# Altium PCB MB1520.PcbDoc (part 5 of 7)
Units mm, origin at the board's own origin, x right, y up, seen from the top; angles counter-clockwise.
Board outline 159 x 88 mm, 6 copper layers (Top Layer, Signal Layer 1, Signal Layer 2, Signal Layer 3, Signal Layer 4, Bottom Layer), stack 1.572 mm thick; 473 components, 377 nets, 1832 pads, 1378 vias.
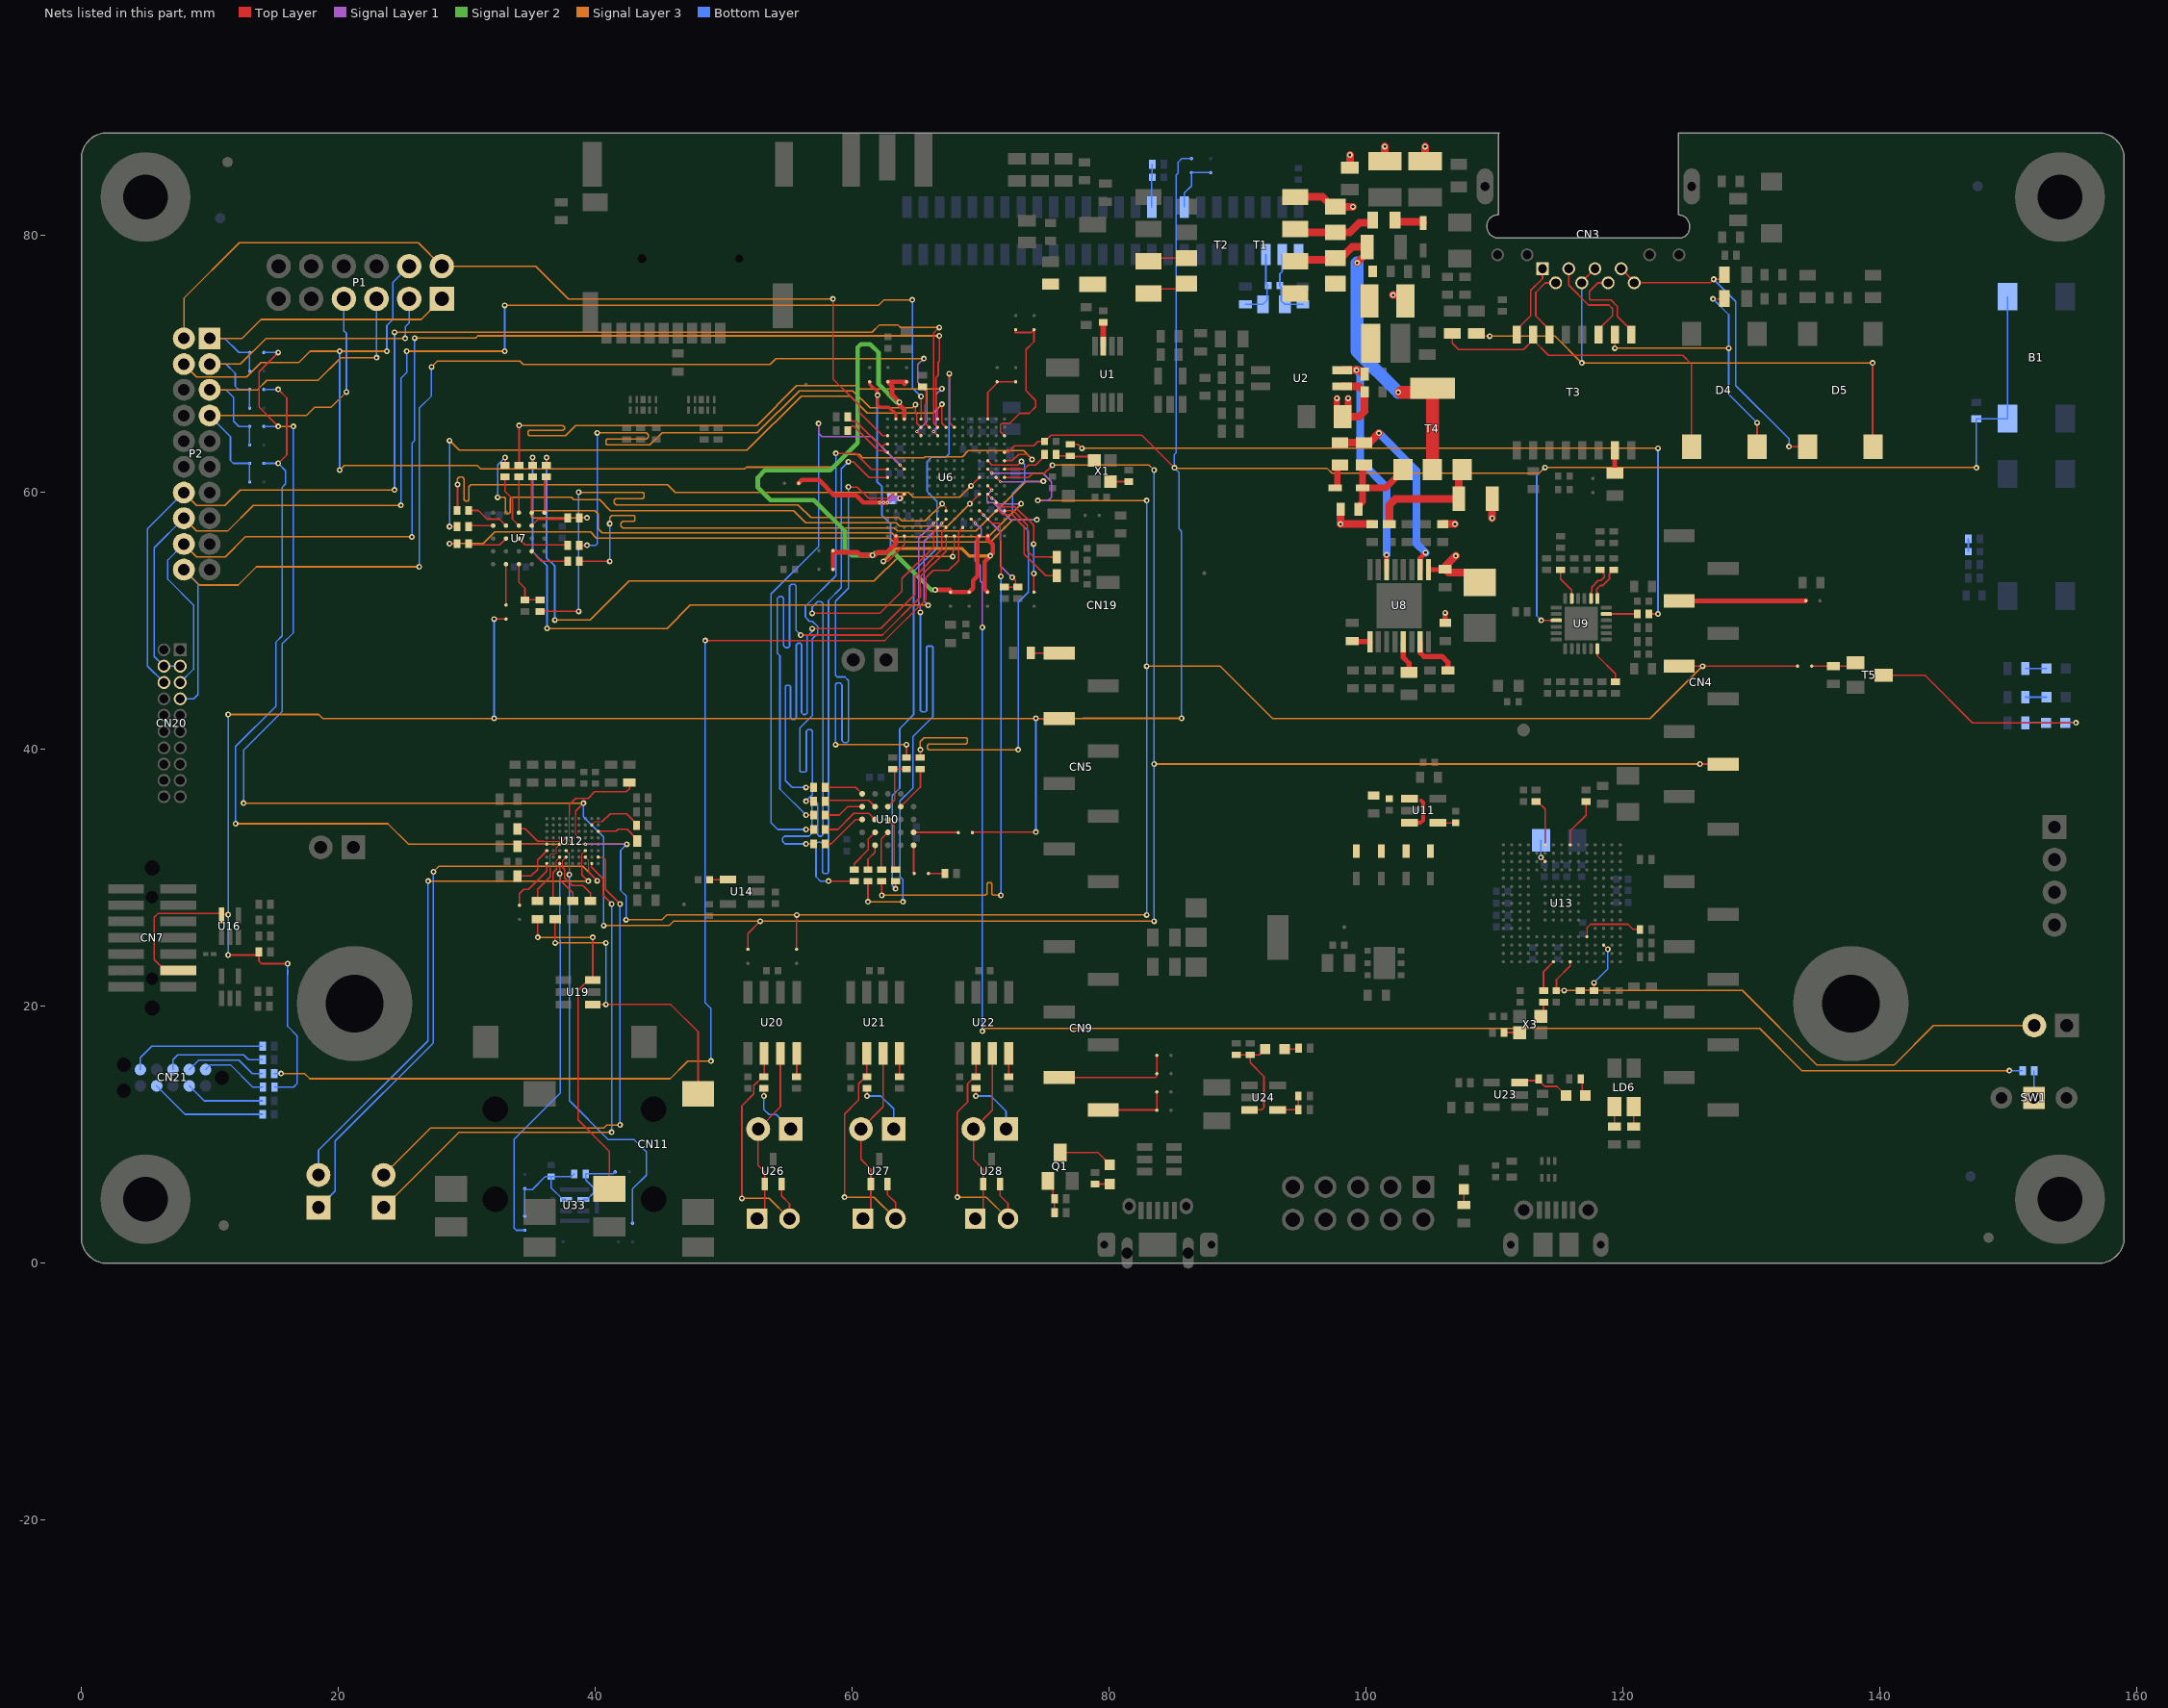
[diagram p8: the nets of this part, all layers, seen from the top]

## Via types
v1: diameter 0.45, hole 0.2, Top Layer to Bottom Layer, tented both sides, 1099 vias
v2: diameter 0.25, hole 0.1, Top Layer to Signal Layer 1, tented both sides, 217 vias
v3: diameter 0.25, hole 0.1, Signal Layer 4 to Bottom Layer, tented both sides, 53 vias
v4: diameter 0.6, hole 0.3, Top Layer to Bottom Layer, tented both sides, 9 vias

## Nets (pads, with @x,y where several pads share a name; then routed paths per layer and width w, separated by ;. In a path a pad name is that pad's centre, name@x,y a point inside that pad or via, vN(x,y) a via of type N, cw(c..) or ccw(c..) an arc to the next point about the centre after c; other vN are vias at no path point) (continued)
NetC73_1: C73.1 C75.2 D8.2 D9.2 D10.2 D11.2 U11.1 U11.3 | length 2.7
  Top Layer w0.3: U11.3@103.386,34.289 104.214,34.289 104.425,34.5 104.425,35.875 104.275,36.025
NetC76_2: C76.2 U11.4 | length 1.4
  Top Layer w0.12: U11.4@105.586,34.289 C76.2@106.986,34.289
NetC78_1: C78.1 U12.E6 | length 4.3
  Top Layer w0.09: 35.945,32.875 37.475,32.875 U12.E6@37.725,33.125
  Top Layer w0.1: C78.1@33.95,33.825 34.55,33.825 35.5,32.875 35.945,32.875
NetC79_2: C79.2 U12.F1 | length 3.5
  Top Layer w0.1: U12.F1@40.225,33.625 41.605,33.625 41.755,33.775 42.475,33.775 43.275,32.975 C79.2@43.275,32.875
NetC80_2: C80.2 U12.D9 | length 2.3
  Top Layer w0.1: C80.2@33.95,32.45 34.125,32.625 U12.D9@36.225,32.625
NetC84_2: C84.2 U12.C9 | length 3.5
  Top Layer w0.1: C84.2@33.95,30.15 35,30.15 35.5,30.65 35.5,31.4 U12.C9@36.225,32.125
NetC85_2: C85.2 U14.4 | length 1.4
  Top Layer w0.12: C85.2@48.9,29.875 U14.4@50.325,29.875
NetC89_1: C89.1 U12.D7 | length 5.3
  Top Layer w0.09: 36.475,30.8 36.475,31.775 36.575,31.875 36.875,31.875 36.975,31.975 36.975,32.375 U12.D7@37.225,32.625
  Top Layer w0.1: C89.1@35.5,28.2 35.5,29.1 36.475,30.075 36.475,30.8
NetC89_2: C89.2 CN11.4 U19.6 | length 27
  Top Layer w0.12: C89.2@35.5,26.8 35.525,26.775 v1(35.525,25.375) ; v1(39.8,25.375) U19.6@39.8,22.05 39.45,22.05 38.65,21.25 38.65,11.175 41.1,8.725 CN11.4@41.1,5.8
  Signal Layer 3 w0.12: v1(35.525,25.375) v1(39.8,25.375)
NetC90_1: C90.1 U12.B7 | length 3.7
  Top Layer w0.09: 36.975,30.8 36.975,31.375 U12.B7@37.225,31.625
  Top Layer w0.1: C90.1@36.875,28.2 36.7,28.375 36.7,30.425 36.975,30.7 36.975,30.8
NetC90_2: C90.2 CN11.6 U19.4 | length 24.5
  Top Layer w0.12: v1(36.875,24.95) C90.2@36.875,26.8 ; U19.4@39.8,20.15 45.875,20.15 48,18.025 CN11.6@48,13.2
  Signal Layer 3 w0.12: v1(36.875,24.95) v1(40.825,24.95)
  Bottom Layer w0.12: v1(40.825,20.15) v1(40.825,24.95)
NetC91_2: C91.2 SB37.2 U12.A7 | length 33.3
  Top Layer w0.1: U12.A7@37.225,31.125 37.225,29.875 38.25,28.85 C91.2@38.25,28.2
  Bottom Layer w0.1: 37.225,27.5 v1(37.225,30.325)
  Bottom Layer w0.12: SB37.2@34.512,2.577 33.848,2.577 33.675,2.75 33.675,9.65 37.28,13.255 37.28,25.118 37.225,25.173 37.225,27.5
NetC92_2: C92.2 U12.B6 | length 4.9
  Top Layer w0.09: 37.475,30.8 37.475,31.375 U12.B6@37.725,31.625
  Top Layer w0.1: 37.475,30.8 37.6,30.675 37.6,30 38.2,29.4 39.05,29.4 39.625,28.825 C92.2@39.625,28.2
NetC104_2: C104.2 JP3.2 U13.J1 | length 43.5
  Top Layer w0.12: C104.2@114.811,21.239 v1(115.411,21.239)
  Top Layer w0.127: C104.2@114.811,21.239 114.811,22.086 115.883,23.158 U13.J1@115.883,23.477
  Signal Layer 3 w0.12: v1(115.411,21.239) 129.286,21.239 135.075,15.45 141.1,15.45 144.167,18.517 JP3.2@152.007,18.517
NetC117_2: C117.2 CN19.32 R136.1 | length 3.3
  Bottom Layer w0.127: CN19.32@83.31,82.217 83.31,84.485 C117.2@83.35,84.525 R136.1@83.35,85.55
NetC118_1: C118.1 C119.2 CN19.45 R138.2 | length 5.5
  Bottom Layer w0.127: R138.2@90.6,74.65 C119.2@91.975,74.65 92.3,74.975 92.3,76.025 C118.1@92.375,76.1 92.2,76.275 CN19.45@92.2,78.531
NetC118_2: C118.2 C119.1 CN19.47 CN19.49 R137.2 | length 6.8
  Bottom Layer w0.127: CN19.49@94.74,78.531 CN19.47@93.47,78.531 93.47,77.195 93.275,77 C118.2@93.275,76.1 93.4,75.975 93.4,74.925 C119.1@93.675,74.65 R137.2@95.075,74.65
NetC130_1: C130.1 SB11.2 U6.E15 U6.F13 | length 10.6
  Top Layer w0.3: v1(63.725,59.55) U6.F13@64.05,59.875
  Top Layer w0.35: SB11.2@55.825,60.725 56.075,60.975 57.425,60.975 58.6,59.8 60.3,59.8 60.875,59.225 v2(62.15,59.225) v2(62.45,59.225) v2(62.75,59.225)
  Signal Layer 1 w0.35: v2(62.15,59.225) v2(62.45,59.225) v2(62.75,59.225) 63.075,59.55 v1(63.725,59.55)
  Bottom Layer w0.45: C130.1@63.025,59.55 v1(63.725,59.55)
NetC138_1: C138.1 R140.1 | length 1
  Bottom Layer w0.12: C138.1@146.875,55.4 R140.1@146.875,56.4
NetC142_2: C142.2 U13.F13 | length 1.8
  Top Layer w0.12: v1(113.608,31.602) U13.F13@113.933,31.277
  Bottom Layer w0.1: v1(113.608,31.602) 113.608,32.908 C142.2@113.625,32.925
NetC158_1: C158.1 R154.2 SB36.1 SB37.1 U33.1 | length 8.9
  Bottom Layer w0.12: SB37.1@34.512,3.677 SB36.1@34.512,5.819 34.581,5.75 35.1,5.75 36.098,6.748 C158.1@36.549,6.748 ; U33.1@37.724,4.973 37.477,4.973 36.549,5.901 C158.1@36.549,6.748 ; R154.2@38.36,6.965 38.143,6.748 C158.1@36.549,6.748
NetCN3_1: CN3.1 T3.16 | length 5.9
  Top Layer w0.13: T3.16@111.741,72.299 111.741,72.691 112.821,73.771 112.821,75.725 113.73,76.634 CN3.1@113.73,77.425
NetCN3_2: CN3.2 T3.14 | length 5.6
  Top Layer w0.13: T3.14@114.281,72.299 114.281,72.669 113.202,73.748 113.202,75.567 113.959,76.325 CN3.2@114.75,76.325
NetCN3_3: CN3.3 T3.11 | length 7.9
  Top Layer w0.13: CN3.3@115.77,77.425 115.77,76.141 117.311,74.6 118.9,74.6 119.171,74.329 119.171,73.771 118.091,72.691 T3.11@118.091,72.299
NetCN3_4: CN3.4 CN3.5 D5.2 R15.2 | length 46.1
  Top Layer w0.12: R15.2@108.586,72.389 108.801,72.175 v1(109.625,72.175) ; CN3.4@116.79,76.325 116.79,76.405 CN3.5@117.81,77.425 ; v1(139.425,70.085) 139.425,63.611 D5.2@139.461,63.574
  Signal Layer 3 w0.12: v1(109.625,72.175) 114.7,72.175 v1(116.79,70.085) v1(139.425,70.085)
  Bottom Layer w0.12: v1(116.79,70.085) CN3.4@116.79,76.325
NetCN3_6: CN3.6 T3.9 | length 7.4
  Top Layer w0.13: CN3.6@118.83,76.325 118.05,76.325 117.375,75.65 117.375,75.075 117.469,74.981 119.058,74.981 119.552,74.487 119.552,73.723 120.631,72.644 T3.9@120.631,72.299
NetCN3_7: CN3.7 CN3.8 D5.1 R9.2 | length 25.7
  Top Layer w0.12: CN3.7@119.85,77.425 120.87,76.405 CN3.8@120.87,76.325 126.775,76.325 v1(127.05,76.6) 127.529,76.6 R9.2@127.888,76.959 ; v1(132.923,63.574) D5.1@134.361,63.574
  Bottom Layer w0.12: v1(127.05,76.6) 128.775,74.875 128.775,68.325 132.923,64.177 v1(132.923,63.574)
NetCN4_8: CN4.8 SB23.1 | length 9.9
  Top Layer w0.127: CN4.8@124.372,51.564 CN4.8@124.375,51.567
  Top Layer w0.35: CN4.8@124.372,51.564 134.189,51.564 SB23.1@134.225,51.6
NetCN5_1: CN5.1 R72.2 | length 2.2
  Top Layer w0.12: R72.2@73.911,47.514 76.098,47.514 CN5.1@76.112,47.5
NetCN9_5: CN9.5 SB31.2 SB32.2 | length 9.3
  Top Layer w0.12: CN9.5@76.112,14.48 83.63,14.48 83.711,14.561 SB32.2@83.711,14.764 SB31.2@83.711,16.189
NetCN9_6: CN9.6 SB33.2 SB34.2 | length 5.6
  Top Layer w0.12: CN9.6@79.541,11.94 83.685,11.94 SB34.2@83.711,11.914 SB33.2@83.711,13.339
NetCN12_1: CN12.1 U12.B3 | length 45.5
  Top Layer w0.09: U12.B3@39.225,31.625 39.475,31.375 39.475,30.8
  Top Layer w0.1: 39.475,30.8 39.475,30.45 v1(40.15,29.775)
  Signal Layer 3 w0.12: v1(27.4,30.475) 27.825,30.9 33.2,30.9 39.025,30.9 v1(40.15,29.775)
  Bottom Layer w0.12: CN12.1@18.453,4.343 19.75,5.64 19.75,9.525 27.4,17.175 v1(27.4,30.475)
NetCN12_2: CN12.2 U12.C3 | length 41.5
  Top Layer w0.09: 38.975,30.85 38.975,31.875 U12.C3@39.225,32.125
  Top Layer w0.1: 38.975,30.85 38.975,30.225 v1(39.45,29.75)
  Signal Layer 3 w0.12: v1(26.975,29.75) 33.2,29.75 v1(39.45,29.75)
  Bottom Layer w0.12: CN12.2@18.453,6.883 18.453,8.803 26.975,17.325 v1(26.975,29.75)
NetCN13_1: CN13.1 U12.A2 | length 41.7
  Top Layer w0.1: U12.A2@39.725,31.125 39.725,30.825 40.6,29.95 40.6,28.65 v1(41.275,27.975)
  Signal Layer 3 w0.12: CN13.1@23.533,4.343 29.39,10.2 v1(41.275,10.2)
  Bottom Layer w0.1: 41.275,27.5 v1(41.275,27.975)
  Bottom Layer w0.12: v1(41.275,10.2) 41.275,27.5
NetCN13_2: CN13.2 U12.B1 | length 41.8
  Top Layer w0.09: U12.B1@40.225,31.625 40.625,31.625 40.8,31.45
  Top Layer w0.1: 40.8,31.45 40.8,29.1 v1(41.925,27.975)
  Signal Layer 3 w0.12: CN13.2@23.533,6.883 27.2,10.55 40.675,10.55 40.9,10.775 v1(41.925,10.775)
  Bottom Layer w0.1: 41.925,27.5 v1(41.925,27.975)
  Bottom Layer w0.12: v1(41.925,10.775) 41.925,27.5
NetCN16_1: CN16.1 JP4.2 U20.7 U26.1 | length 14.1
  Top Layer w0.12: CN16.1@52.58,3.475 53.2,4.095 U26.1@53.2,6.175 53.2,7.1 52.68,7.62 JP4.2@52.68,10.45 54.41,12.18 U20.7@54.41,16.35
NetCN16_2: CN16.2 R119.1 U20.6 U26.2 | length 19.4
  Top Layer w0.12: v1(51.41,5.06) 51.41,12.265 52.335,13.19 52.335,13.835 53.025,14.525 R119.1@53.125,14.525 53.14,14.54 U20.6@53.14,16.35 ; U26.2@54.5,6.175 54.5,5.25 55.12,4.63 CN16.2@55.12,3.475
  Signal Layer 3 w0.12: v1(51.41,5.06) 53.535,5.06 CN16.2@55.12,3.475
NetCN17_1: CN17.1 JP5.2 U21.7 U27.1 | length 14.2
  Top Layer w0.12: CN17.1@60.83,3.475 61.45,4.095 U27.1@61.45,6.175 61.45,7.325 60.68,8.095 JP5.2@60.68,10.45 62.41,12.18 U21.7@62.41,16.35
NetCN17_2: CN17.2 R121.1 U21.6 U27.2 | length 19.6
  Top Layer w0.12: v1(59.4,5.15) 59.4,11.625 60.5,12.725 60.5,13.975 61.05,14.525 R121.1@61.15,14.525 61.14,14.535 U21.6@61.14,16.35 ; U27.2@62.75,6.175 62.75,5.35 63.37,4.73 CN17.2@63.37,3.475
  Signal Layer 3 w0.12: v1(59.4,5.15) 61.695,5.15 CN17.2@63.37,3.475
NetCN18_1: CN18.1 JP6.2 U22.7 U28.1 | length 14.1
  Top Layer w0.12: CN18.1@69.58,3.475 70.2,4.095 U28.1@70.2,6.175 70.2,7.325 69.43,8.095 JP6.2@69.43,10.45 70.91,11.93 U22.7@70.91,16.35
NetCN18_2: CN18.2 R123.1 U22.6 U28.2 | length 19.5
  Top Layer w0.12: v1(68.175,5.15) 68.175,11.75 68.975,12.55 68.975,13.975 69.525,14.525 R123.1@69.625,14.525 69.64,14.54 U22.6@69.64,16.35 ; U28.2@71.5,6.175 71.5,5.275 72.12,4.655 CN18.2@72.12,3.475
  Signal Layer 3 w0.12: v1(68.175,5.15) 70.445,5.15 CN18.2@72.12,3.475
NetCN19_36: CN19.36 SB43.1 SB44.1 | length 4.4
  Bottom Layer w0.12: CN19.36@85.85,82.217 85.85,83.325 86.4,83.875 SB44.1@86.4,84.9 SB43.1@87.9,84.9
NetCN21_2: CN21.2 R152.2 | length 6.2
  Bottom Layer w0.12: CN21.2@8.395,13.815 9.56,12.65 R152.2@14.1,12.65
NetCN21_4: CN21.4 R153.2 | length 9.2
  Bottom Layer w0.12: CN21.4@5.855,13.815 8.07,11.6 R153.2@14.1,11.6
NetCN21_6: CN21.6 R147.2 | length 10.8
  Bottom Layer w0.12: CN21.6@4.585,15.085 4.585,16.01 5.475,16.9 R147.2@14.1,16.9
NetCN21_8: CN21.8 R148.2 | length 8.1
  Bottom Layer w0.12: CN21.8@7.125,15.085 7.125,15.85 7.5,16.225 12.625,16.225 13,15.85 R148.2@14.1,15.85
NetCN21_9: CN21.9 R150.2 | length 6.4
  Bottom Layer w0.12: CN21.9@8.395,15.085 9.135,15.825 12.25,15.825 13.3,14.775 R150.2@14.1,14.775
NetCN21_10: CN21.10 R151.2 | length 5.3
  Bottom Layer w0.12: CN21.10@9.665,15.085 10.035,15.455 11.595,15.455 13.325,13.725 R151.2@14.125,13.725
NetD3_1: D3.1 R4.1 | length 2.3
  Top Layer w0.6: R4.1@102.261,81.214 102.401,81.075 104.346,81.075 D3.1@104.436,80.984
NetD4_1: D4.1 R14.2 T3.15 | length 27.5
  Top Layer w0.12: R14.2@106.711,72.389 106.711,71.614 107.2,71.125 112.25,71.125 T3.15@113.011,71.886 ; T3.15@113.011,72.299 T3.15@113.011,71.886 ; D4.1@125.336,63.574 125.336,69.989 124.65,70.675 114.2,70.675 113.011,71.864 T3.15@113.011,71.886
NetD4_2: D4.2 R12.2 T3.10 | length 23.7
  Top Layer w0.12: v1(119.361,71.239) T3.10@119.361,72.299 ; v1(127,75.075) 127.872,75.075 R12.2@127.886,75.089 ; D4.2@130.436,63.574 v1(130.436,65.439)
  Signal Layer 3 w0.12: v1(119.361,71.239) v1(128.225,71.239)
  Bottom Layer w0.12: v1(127,75.075) 128.225,73.85 128.225,67.65 v1(130.436,65.439)
NetD6_1: D6.1 R34.2 R44.2 T4.1 | length 7.4
  Top Layer w0.508: R44.2@99.411,58.689 99.411,58.961 99.731,59.281 D6.1@99.731,60.364 ; R34.2@99.836,62.139 99.731,62.034 D6.1@99.731,60.364 ; T4.1@102.869,61.778 102.869,61.703 101.53,60.364 D6.1@99.731,60.364
NetD6_2: D6.2 R33.1 | length 1.9
  Top Layer w0.508: D6.2@97.591,60.364 97.761,60.534 97.761,61.939 R33.1@97.961,62.139
NetJP4_1: JP4.1 R119.2 | length 4.4
  Top Layer w0.12: v1(53.125,13.025) R119.2@53.125,13.625
  Bottom Layer w0.12: v1(53.125,13.025) 53.125,11.975 53.525,11.575 54.095,11.575 JP4.1@55.22,10.45
NetJP5_1: JP5.1 R121.2 | length 4.7
  Top Layer w0.12: v1(61.15,13.025) R121.2@61.15,13.625
  Bottom Layer w0.12: v1(61.15,13.025) 62.225,13.025 63.22,12.03 JP5.1@63.22,10.45
NetJP6_1: JP6.1 R123.2 | length 4.8
  Top Layer w0.12: v1(69.625,13.025) R123.2@69.625,13.625
  Bottom Layer w0.12: v1(69.625,13.025) 70.8,13.025 71.97,11.855 JP6.1@71.97,10.45
NetLD1_2: LD1.2 R144.2 | length 1.6
  Bottom Layer w0.12: R144.2@151.325,44.075 LD1.2@152.95,44.075
NetLD2_2: LD2.2 R143.2 | length 1.6
  Bottom Layer w0.12: R143.2@151.325,46.3 LD2.2@152.95,46.3
NetLD3_1: LD3.1 R126.1 | length 1.4
  Top Layer w0.12: R126.1@116.711,14.364 116.825,14.251 116.825,13.301 LD3.1@117.061,13.064
NetLD3_2: LD3.2 R125.1 U23.3 | length 4.3
  Top Layer w0.12: U23.3@111.961,14.064 112.122,14.225 113.297,14.225 R125.1@113.436,14.364 113.436,14.239 113.9,13.775 114.851,13.775 LD3.2@115.561,13.064
NetLD4_1: LD4.1 R132.1 | length 1.2
  Top Layer w0.12: R132.1@78.9,6.175 LD4.1@80.05,6.175
NetLD4_2: LD4.2 Q1.3 | length 4.3
  Top Layer w0.12: Q1.3@76.175,8.625 79.125,8.625 80.05,7.7 LD4.2@80.05,7.675
NetLD5_1: LD5.1 R134.2 | length 1.2
  Top Layer w0.12: R134.2@107.611,4.539 LD5.1@107.611,5.764
NetLD6_2: LD6.2 R131.1 | length 1.5
  Top Layer w0.127: R131.1@120.836,10.664 LD6.2@120.836,12.189
NetLD6_3: LD6.3 R130.1 | length 1.5
  Top Layer w0.127: R130.1@119.336,10.664 LD6.3@119.336,12.189
NetLD7_1: LD7.1 R118.1 | length 1.1
  Top Layer w0.12: LD7.1@93.651,16.688 94.661,16.688 R118.1@94.737,16.764
NetLD7_2: LD7.2 R116.1 R117.1 U24.3 | length 8.2
  Top Layer w0.12: R116.1@89.9,16.225 R117.1@90.975,16.225 ; U24.3@90.925,11.95 91.875,11.95 92.05,12.125 92.05,14.55 90.975,15.625 R117.1@90.975,16.225 ; LD7.2@92.151,16.688 91.688,16.225 R117.1@90.975,16.225
NetLD8_1: LD8.1 R145.1 | length 1.6
  Bottom Layer w0.12: R145.1@151.325,42.075 LD8.1@152.925,42.075
NetLD8_2: LD8.2 T5.3 | length 17.3
  Top Layer w0.12: T5.3@140.3,45.789 143.486,45.789 147.2,42.075 v1(155.25,42.075)
  Bottom Layer w0.12: LD8.2@154.425,42.075 v1(155.25,42.075)
NetQ1_1: Q1.1 R133.1 R135.1 | length 2.7
  Top Layer w0.12: Q1.1@75.225,6.425 75.625,6.025 75.625,5.15 R133.1@75.75,5.025 R135.1@75.75,3.95
NetR16_2: R16.2 U1.3 | length 1.8
  Top Layer w0.45: R16.2@79.536,73.239 79.55,73.226 U1.3@79.55,71.4
NetR22_2: R22.2 U2.4 U8.14 | length 18.4
  Top Layer w0.35: U8.14@101.6,53.996 U8.14@101.6,54.2
  Top Layer w0.4: U8.14@101.6,54.2 v1(101.6,55.15)
  Top Layer w0.6: U2.4@98.136,69.524 v1(99.25,69.524) 99.451,69.524 99.761,69.214 R22.2@99.886,69.214
  Bottom Layer w0.6: v1(99.25,69.524) 99.525,69.249 99.525,62.475 101.6,60.4 v1(101.6,55.15)
NetR24_2: R24.2 U6.P10 | length 3.3
  Top Layer w0.1: R24.2@65.725,68.225 65.725,66.9 65.675,66.85 65.675,65.4 U6.P10@66,65.075
NetR25_2: R25.2 U6.M15 | length 4.1
  Top Layer w0.13: R25.2@59.65,65.9 59.997,65.553 60.272,65.553 62.185,63.641 62.426,63.641 62.56,63.775 U6.M15@62.75,63.775
NetR32_2: R32.2 U6.L15 | length 4.1
  Top Layer w0.13: R32.2@59.65,64.825 59.997,65.172 60.114,65.172 62.027,63.26 62.325,63.26 62.426,63.26 62.56,63.125 U6.L15@62.75,63.125
NetR33_2: R33.2 R34.1 U8.10 | length 15.6
  Top Layer w0.4: U8.10@104.201,53.996 104.201,54.901 v1(104.625,55.325)
  Top Layer w0.6: R33.2@97.961,63.889 R34.1@99.836,63.889 100.264,63.889 v1(101,64.625)
  Bottom Layer w0.6: v1(101,64.625) 103.925,61.7 103.925,56.025 v1(104.625,55.325)
NetR35_2: R35.2 R36.1 X1.3 | length 3.2
  Top Layer w0.127: R36.1@75.875,62.975 76,62.85 R35.2@76.975,62.85 77.025,62.8 78.55,62.8 X1.3@78.85,62.5
NetR36_2: R36.2 U6.J1 | length 3.7
  Top Layer w0.127: U6.J1@71.85,61.825 73.4,61.825 73.725,62.15 74.275,62.15 74.975,62.85 R36.2@74.975,62.975
NetR37_2: R37.2 U6.F4 | length 45.7
  Top Layer w0.127: R37.2@32.975,62.125 v1(32.975,62.725) ; v1(69.15,59.125) U6.F4@69.9,59.875
  Signal Layer 3 w0.102: v1(32.4,59.625) 32.925,59.625 33,59.55 33,58.475 33.1,58.375 33.275,58.375 33.375,58.475 33.375,59.525 33.475,59.625 38.15,59.625 38.326,59.449 38.939,59.449 38.94,59.45 40.331,59.45 41.181,58.6 55.432,58.6 56.375,57.657 63.424,57.657 63.683,57.398 67.423,57.398 v1(69.15,59.125)
  Bottom Layer w0.127: v1(32.4,59.625) 32.4,62.15 v1(32.975,62.725)
NetR38_1: R38.1 U6.N9 | length 48
  Top Layer w0.127: R38.1@34.05,62.125 34.076,62.151 v1(34.076,65.226) ; v2(66.325,64.75) U6.N9@66.65,64.425
  Signal Layer 1 w0.1: v2(66.325,64.75) 66.539,64.963 66.539,67.639 v1(66.975,68.075)
  Signal Layer 3 w0.102: v1(34.076,65.226) 37.475,65.226 37.6,65.101 37.6,64.95 37.475,64.825 34.85,64.825 34.75,64.725 34.75,64.525 34.85,64.425 37.674,64.425 38.475,65.226 52.576,65.226 55.675,68.325 60.325,68.325 60.575,68.075 v1(66.975,68.075)
NetR39_1: R39.1 U6.C8 | length 52.3
  Top Layer w0.127: R39.1@35.125,62.125 v1(35.125,62.725) ; v2(66.975,57.6) U6.C8@67.3,57.925
  Signal Layer 1 w0.1: v1(65.9,51.225) 65.578,51.547 65.578,56.203 v2(66.975,57.6)
  Signal Layer 3 w0.102: v1(36.25,49.425) 45.575,49.425 47.401,51.251 65.874,51.251 v1(65.9,51.225)
  Bottom Layer w0.127: v1(35.125,62.725) 35.125,55.396 36.25,54.271 v1(36.25,49.425)
NetR40_1: R40.1 U6.A7 | length 48.2
  Top Layer w0.1: v1(67.825,55.025) 67.825,55.413 67.95,55.538 U6.A7@67.95,56.625
  Top Layer w0.127: R40.1@36.2,62.125 v1(36.2,62.725)
  Signal Layer 3 w0.102: v1(36.85,50.075) 39.6,50.075 42.625,53.1 61.7,53.1 63.625,55.025 v1(67.825,55.025)
  Bottom Layer w0.127: v1(36.2,62.725) 36.2,54.925 36.85,54.275 v1(36.85,50.075)
NetR41_1: R41.1 X1.1 | length 1.4
  Top Layer w0.12: X1.1@80.1,60.85 R41.1@81.525,60.85
NetR42_1: R42.1 T3.7 | length 1.8
  Top Layer w0.381: R42.1@119.361,61.514 T3.7@119.361,63.279
NetR43_2: R43.2 R47.2 T4.3 | length 9.5
  Top Layer w0.6: R47.2@101.811,57.539 101.811,59.061 102.264,59.514 R43.2@107.211,59.514 T4.3@107.211,61.52
  Top Layer w0.762: T4.3@107.211,61.52 T4.3@107.469,61.778
NetR45_2: R45.2 U6.H4 | length 47
  Top Layer w0.127: R45.2@29.25,58.6 29.275,58.625 v1(29.275,60.625) ; v1(69.25,60.525) U6.H4@69.9,61.175
  Signal Layer 3 w0.102: v1(29.275,60.625) 29.275,61.05 29.425,61.2 29.675,61.2 29.8,61.075 29.8,59.45 29.9,59.35 30.075,59.35 30.175,59.45 30.175,60.475 30.325,60.625 45.625,60.625 46.225,60.025 64.375,60.025 64.75,59.65 68.375,59.65 v1(69.25,60.525)
NetR46_2: R46.2 U6.F3 | length 48.9
  Top Layer w0.127: R46.2@38.75,58.025 v1(39.35,58.025) ; U6.F3@70.55,59.875 v2(70.875,59.55)
  Signal Layer 1 w0.1: v2(70.875,59.55) 70.98,59.445 71.058,59.445 71.378,59.125 v1(73.15,59.125)
  Signal Layer 3 w0.102: v1(39.35,58.025) 35.15,58.025 35.025,58.15 35.025,58.425 35.175,58.575 39.975,58.575 40.225,58.325 40.225,57.15 40.522,56.853 63.091,56.853 63.369,56.575 70.6,56.575 v1(73.15,59.125)
NetR48_1: R48.1 U6.P8 | length 50.4
  Top Layer w0.1: v1(66.975,66.875) 66.975,65.402 66.974,65.401 U6.P8@67.3,65.075
  Top Layer w0.127: v1(28.65,57.35) R48.1@29.25,57.35
  Signal Layer 3 w0.102: v1(28.65,64.049) 29.399,63.3 51.819,63.3 56.019,67.5 59.875,67.5 61.177,66.198 66.298,66.198 v1(66.975,66.875)
  Bottom Layer w0.127: v1(28.65,57.35) v1(28.65,64.049)
NetR52_2: R52.2 U6.G3 | length 53.7
  Top Layer w0.127: v1(28.65,56.025) R52.2@29.25,56.025 ; U6.G3@70.55,60.525 v2(70.875,60.2)
  Signal Layer 1 w0.1: v2(70.875,60.2) 70.475,59.8 70.475,59.325 70.575,59.225 70.967,59.225 71.17,59.022 72.317,57.875 v1(74.375,57.875)
  Signal Layer 3 w0.102: v1(28.65,56.025) 31.275,56.025 32.175,56.925 39.625,56.925 40.099,56.451 62.925,56.451 63.226,56.15 70.744,56.15 72.469,57.875 v1(74.375,57.875)
NetR53_2: R53.2 U6.P11 | length 46.5
  Top Layer w0.1: v1(64.925,66.85) 64.925,66.175 65.025,66.075 65.025,65.4 U6.P11@65.35,65.075
  Top Layer w0.127: R53.2@38.75,55.9 v1(39.35,55.9)
  Signal Layer 3 w0.102: v1(40.15,64.65) 43.975,64.65 44.125,64.5 44.125,64.3 43.975,64.15 40.925,64.15 40.825,64.05 40.825,63.8 40.923,63.702 44.252,63.702 45.2,64.65 52.6,64.65 55.873,67.923 60.052,67.923 61.375,66.6 64.675,66.6 v1(64.925,66.85)
  Bottom Layer w0.127: v1(39.35,55.9) 40.025,55.9 40.15,56.025 v1(40.15,64.65)
NetR56_2: R56.2 U9.11 | length 2.6
  Top Layer w0.12: R56.2@115.125,53.975 115.125,53.275 116,52.4 U9.11@116,51.75
NetR58_2: R58.2 U9.8 | length 2.9
  Top Layer w0.13: U9.8@117.5,51.75 117.5,52.24 117.559,52.3 117.559,52.642 118.067,53.15 118.272,53.15 118.547,53.425 118.547,53.628 R58.2@118.2,53.975
NetR59_2: R59.2 U9.7 | length 2.9
  Top Layer w0.13: U9.7@118,51.75 118,52.24 117.94,52.299 117.94,52.485 118.225,52.769 118.43,52.769 118.928,53.267 118.928,53.628 R59.2@119.275,53.975
NetR60_2: R60.2 U6.H2 | length 48
  Top Layer w0.1: U6.H2@71.2,61.175 v2(71.525,60.85)
  Top Layer w0.127: R60.2@38.75,54.65 v1(41.125,54.65)
  Signal Layer 1 w0.1: v2(71.525,60.85) 73.775,60.85 ; 73.775,60.85 74.85,60.85 v1(74.875,60.875)
  Signal Layer 3 w0.102: v1(41.125,57.575) 41.125,58.05 41.273,58.198 43,58.198 43.075,58.123 43.075,57.837 42.988,57.75 42.125,57.75 42,57.625 42,57.38 42.125,57.255 63.258,57.255 63.517,56.996 69.646,56.996 73.525,60.875 v1(74.875,60.875)
  Bottom Layer w0.127: v1(41.125,54.65) v1(41.125,57.575)
NetR63_2: R63.2 R64.2 U6.D4 | length 8.2
  Top Layer w0.1: R63.2@71.85,52.65 R64.2@72.9,52.65 72.7,52.85 72.7,53.15 v1(72.45,53.4)
  Top Layer w0.127: U6.D4@69.9,58.575 v2(70.225,58.25)
  Signal Layer 1 w0.1: v2(70.225,58.25) 71.55,56.925 71.55,54.266 v1@72.433,53.383
NetR66_1: R66.1 U6.D8 | length 47.7
  Top Layer w0.127: R66.1@35.7,50.745 35.706,50.75 v1(38.7,50.75) ; v1(67,59.125) 67.3,58.825 U6.D8@67.3,58.575
  Signal Layer 3 w0.102: v1(38.7,60.025) 43.7,60.025 43.8,59.925 43.8,59.65 43.675,59.525 41.575,59.525 41.475,59.425 41.475,59.167 41.6,59.042 55.792,59.042 56.775,58.059 63.591,58.059 63.85,57.8 65.675,57.8 v1(67,59.125)
  Bottom Layer w0.127: v1(38.7,50.75) v1(38.7,60.025)
NetR68_2: R68.2 U9.5 | length 2.4
  Top Layer w0.12: U9.5@118.7,50.55 R68.2@121.1,50.55
NetR69_1: R69.1 U8.1 | length 1.4
  Top Layer w0.4: R69.1@98.918,48.446 98.967,48.396 U8.1@100.301,48.396
NetR73_1: R73.1 SB25.1 T5.1 | length 3.5
  Top Layer w0.12: SB25.1@134.686,46.489 R73.1@136.361,46.489 137.836,46.489 T5.1@138.086,46.739
NetR74_2: R74.2 U8.5 | length 2.6
  Top Layer w0.4: U8.5@102.901,48.396 102.901,47.149 103.336,46.714 R74.2@103.336,46.014
NetR75_2: R75.2 U8.7 | length 3.9
  Top Layer w0.4: U8.7@104.201,48.396 104.201,47.549 104.499,47.251 105.899,47.251 106.361,46.789 R75.2@106.361,46.164
NetR80_1: R80.1 U9.24 | length 3.2
  Top Layer w0.12: U9.24@118,47.85 118,47.3 119.4,45.9 R80.1@119.4,45.275
NetR82_1: R82.1 U6.F14 | length 42
  Top Layer w0.1: v1(59.7,60.437) 60.388,60.437 61.275,59.55 62.8,59.55 63.125,59.875 U6.F14@63.4,59.875
  Top Layer w0.127: R82.1@64.225,39.375 v1(64.225,40.375)
  Signal Layer 3 w0.102: v1(58.7,40.375) v1(64.225,40.375)
  Bottom Layer w0.1: 59.7,52.625 v1(59.7,60.437)
  Bottom Layer w0.127: v1(58.7,40.375) 58.7,45.075 58.8,45.175 59.063,45.175 59.2,45.037 59.2,40.675 59.35,40.525 59.575,40.525 59.7,40.65 59.7,45.375 59.425,45.65 58.825,45.65 58.7,45.775 58.7,51.546 59.7,52.546 59.7,52.625
NetR83_2: R83.2 U6.K3 | length 42.6
  Top Layer w0.1: U6.K3@70.55,62.475 70.875,62.15 72.9,62.15 v1(73.175,62.425)
  Top Layer w0.127: R83.2@65.3,39.375 v1(65.3,39.975)
  Signal Layer 3 w0.102: v1(65.3,39.975) 65.3,40.625 65.6,40.925 68.875,40.925 68.975,40.825 68.975,40.55 68.85,40.425 65.95,40.425 65.85,40.325 65.85,40.075 65.95,39.975 v1(72.925,39.975)
  Bottom Layer w0.127: v1(72.925,39.975) 72.925,51.475 73.704,52.253 73.704,56.997 72.475,58.225 72.475,59.925 73.425,60.875 73.425,62.175 v1(73.175,62.425)
NetR86_2: R86.2 U12.D4 U12.D5 | length 9.3
  Top Layer w0.09: 37.975,34.9 37.975,32.875 U12.D5@38.225,32.625
  Top Layer w0.1: 37.975,34.9 37.975,35.7 38.475,36.2 39.45,36.2 39.95,36.7 42.4,36.7 42.65,36.95 R86.2@42.65,37.425 ; U12.D5@38.225,32.625 U12.D4@38.725,32.625
NetR87_1: R87.1 U6.B8 | length 47.3
  Top Layer w0.1: 64.873,52.625 64.873,53.473 66.975,55.575 66.975,56.95 U6.B8@67.3,57.275
  Top Layer w0.127: v1(56.4,37.05) R87.1@57,37.05 ; v1(56.875,49.4) 62.208,49.4 64.873,52.065 64.873,52.625
  Bottom Layer w0.127: v1(56.4,37.05) 55.325,37.05 54.802,37.573 54.802,44.925 54.877,45 55.113,45 55.2,44.913 55.2,42.45 55.3,42.35 55.525,42.35 55.65,42.475 55.65,48.15 55.775,48.275 55.95,48.275 56.05,48.175 56.05,42.875 56.196,42.729 56.375,42.729 56.477,42.831 56.477,48.79 56.875,49.188 v1(56.875,49.4)
NetR88_1: R88.1 U13.F15 | length 3.7
  Top Layer w0.127: R88.1@113.236,35.939 113.361,35.939 113.933,35.368 U13.F15@113.933,32.577
NetR89_2: R89.2 U13.J15 | length 3.9
  Top Layer w0.127: U13.J15@115.883,32.577 115.883,33.658 117.111,34.886 R89.2@117.111,35.939
NetR91_1: R91.1 U6.J15 | length 41.8
  Top Layer w0.1: 59.175,63.05 60.275,63.05 61.5,61.825 U6.J15@62.75,61.825
  Top Layer w0.127: v1(56.4,35.975) R91.1@57,35.975 ; v1(58.725,63.05) 59.175,63.05
  Bottom Layer w0.127: v1@56.418,35.975 56.418,35.993 56.904,36.479 56.904,41.425 56.779,41.55 56.55,41.55 56.425,41.425 56.425,38.325 56.35,38.25 56,38.25 55.925,38.325 55.925,41.675 56.904,42.654 56.904,48.613 57.302,49.011 57.302,49.577 56.904,49.975 56.675,49.975 56.35,50.3 56.35,51.15 58.725,53.525 v1(58.725,63.05)
NetR93_1: R93.1 U6.A8 | length 48.6
  Top Layer w0.1: 65.3,52.625 65.3,53.45 67.3,55.45 U6.A8@67.3,56.625
  Top Layer w0.127: v1(55.991,48.909) 62.352,48.909 65.3,51.857 65.3,52.625 ; v1(56.4,34.9) R93.1@57,34.9
  Bottom Layer w0.127: v1(55.991,48.909) 55.625,49.275 55.625,52.725 55.5,52.85 55.25,52.85 55.125,52.725 55.125,48.042 55.008,47.925 54.825,47.925 54.65,48.1 54.65,51.775 54.5,51.925 54.35,51.925 54.175,51.75 54.175,47.492 54.375,47.292 54.375,36.925 v1(56.4,34.9)
NetR94_2: R94.2 U12.G2 | length 4.3
  Top Layer w0.09: U12.G2@39.725,34.125 39.975,34.375 40.55,34.375
  Top Layer w0.1: 40.55,34.375 41.175,35 42.45,35 43.2,34.25 R94.2@43.2,34.1
NetR95_1: R95.1 U6.J13 | length 44.7
  Top Layer w0.127: v1(56.4,33.775) R95.1@57,33.775 ; v2(63.725,62.15) U6.J13@64.05,61.825
  Signal Layer 1 w0.1: v1(57.375,65.375) 57.375,64.625 57.647,64.353 61.522,64.353 v2(63.725,62.15)
  Bottom Layer w0.127: v1(56.4,33.775) 54.2,33.775 53.675,34.3 53.675,52.1 57.375,55.8 57.375,59.95 57.377,59.952 v1@57.377,65.375
NetR96_1: R96.1 U6.B9 | length 44.4
  Top Layer w0.1: 63.875,52.625 63.875,53.3 66.325,55.75 66.325,56.95 U6.B9@66.65,57.275
  Top Layer w0.127: v1(56.4,32.65) R96.1@57,32.65 ; v1(56.875,50.6) 62.164,50.6 63.875,52.311 63.875,52.625
  Bottom Layer w0.127: v1(56.4,32.65) 54.775,32.65 54.575,32.85 54.575,33.1 54.725,33.25 56.637,33.25 56.862,33.475 56.862,35.834 56.979,35.95 57.15,35.95 57.3,35.8 57.3,33.375 57.425,33.25 57.6,33.25 57.729,33.379 57.729,51.346 57.575,51.5 57.304,51.5 56.875,51.071 v1(56.875,50.6)
NetR98_1: R98.1 U6.H15 | length 45.2
  Top Layer w0.1: v1(59.7,62.4) 60.075,62.4 61.3,61.175 U6.H15@62.75,61.175
  Top Layer w0.127: v1(58.156,29.756) 60.144,29.756 R98.1@60.15,29.75
  Bottom Layer w0.127: v1@58.156,29.8 v1(58.156,29.756) 57.519,29.756 57.175,30.1 57.175,32.65 57.3,32.775 57.575,32.775 57.675,32.675 57.675,30.45 57.775,30.35 58.056,30.35 58.156,30.45 58.156,51.606 59.152,52.602 59.152,61.852 v1(59.7,62.4)
NetR99_1: R99.1 U6.C9 | length 46.9
  Top Layer w0.127: v1(61.225,28.15) R99.1@61.225,29.75 ; v2(66.325,57.6) U6.C9@66.65,57.925
  Signal Layer 1 w0.1: v1(65.3,50.675) 65.3,51.259 65.178,51.381 65.178,56.453 v2(66.325,57.6)
  Signal Layer 3 w0.102: v1(61.225,28.15) v1(63.95,28.15)
  Bottom Layer w0.127: v1(63.95,28.15) 63.95,29.875 63.725,30.1 63.725,36 64.725,37 64.725,41 66.275,42.55 66.275,47.975 66.2,48.05 65.875,48.05 65.8,47.975 65.8,43.05 65.675,42.925 65.425,42.925 65.3,43.05 v1(65.3,50.675)
NetR100_2: R100.2 U6.C3 | length 42.1
  Top Layer w0.1: U6.C3@70.55,57.925 70.875,57.6 71.425,57.6 71.5,57.525 71.5,56.333 71.575,56.258 v1(71.575,53.475)
  Top Layer w0.127: v1(62.3,28.65) R100.2@62.3,29.75
  Signal Layer 3 w0.102: v1(62.3,28.65) 70.35,28.65 70.475,28.775 70.475,29.525 70.575,29.625 70.775,29.625 70.875,29.525 70.875,28.75 70.975,28.65 v1(71.575,28.65)
  Bottom Layer w0.127: v1(71.575,28.65) v1(71.575,53.475)
NetR101_2: R101.2 U6.P7 | length 48.3
  Top Layer w0.1: v1(67.552,69.25) 67.565,69.237 67.565,68.904 67.625,68.844 67.625,65.4 U6.P7@67.95,65.075
  Top Layer w0.127: v1(63.375,29.15) R101.2@63.375,29.75
  Bottom Layer w0.127: v1(63.375,29.15) 63.125,29.4 63.125,36.425 63.7,37 63.7,41.625 64.775,42.7 64.775,53.85 66.592,55.667 66.592,59.308 65.825,60.075 65.825,62.425 66.15,62.75 67.275,62.75 67.537,63.011 67.537,66.787 67.552,66.802 v1(67.552,69.25)
NetR102_1: R102.1 SB27.2 | length 1.3
  Top Layer w0.127: SB27.2@65.925,30.35 R102.1@67.225,30.35
NetR105_2: R105.2 U13.L4 | length 5.1
  Top Layer w0.12: U13.L4@117.183,25.427 117.183,26.108 117.475,26.4 120.375,26.4 120.786,25.989 R105.2@121.311,25.989
NetR111_1: R111.1 X3.3 | length 1.2
  Top Layer w0.127: X3.3@113.611,19.214 113.811,19.414 R111.1@113.811,20.339
NetR111_2: R111.2 U13.G1 | length 2.6
  Top Layer w0.127: R111.2@113.811,21.239 113.811,22.705 U13.G1@114.583,23.477
NetR112_1: R112.1 R113.1 U13.N3 | length 5.2
  Top Layer w0.12: R112.1@116.661,21.239 R113.1@117.736,21.239 v1(117.736,21.839) ; U13.N3@118.483,24.777 v1(118.808,24.452)
  Bottom Layer w0.12: v1(117.736,21.839) 118.808,22.911 v1(118.808,24.452)
NetR115_2: R115.2 X3.1 | length 1.2
  Top Layer w0.127: R115.2@110.736,17.964 X3.1@111.961,17.964
NetR120_1: R120.1 U20.8 | length 1.8
  Top Layer w0.12: R120.1@55.675,14.525 55.68,14.53 U20.8@55.68,16.35
NetR122_1: R122.1 U21.8 | length 1.8
  Top Layer w0.12: R122.1@63.675,14.525 63.68,14.53 U21.8@63.68,16.35
NetR124_1: R124.1 U22.8 | length 1.8
  Top Layer w0.12: R124.1@72.175,14.525 72.18,14.53 U22.8@72.18,16.35
NetR128_2: R128.2 R129.2 U24.4 | length 2.7
  Top Layer w0.12: U24.4@93.125,11.95 R129.2@94.725,11.95 R128.2@94.725,13.025
NetR149_1: R149.1 U6.C5 | length 123
  Top Layer w0.127: U6.C5@69.25,57.925 v2(69.575,57.6)
  Signal Layer 1 w0.1: v2(69.575,57.6) 70.025,57.15 70.025,56.65 69.575,56.2 69.575,54.7 69.953,54.322 69.953,53.125 70.125,52.953 v1(70.125,49.5)
  Signal Layer 3 w0.12: v1(70.125,18.075) 70.33,18.28 130.645,18.28 133.925,15 v1(150.075,15)
  Bottom Layer w0.12: v1(70.125,18.075) v1(70.125,49.5) ; v1(150.075,15) R149.1@151.1,15
NetR149_2: R149.2 SW1.1 | length 2.1
  Bottom Layer w0.12: SW1.1@151.981,12.878 152,12.897 R149.2@152,15
NetR154_1: R154.1 SB35.2 U33.2 | length 5.1
  Bottom Layer w0.12: U33.2@39.074,4.973 39.349,4.973 39.85,5.474 39.85,5.9 39.26,6.49 R154.1@39.26,6.965 41.391,6.965 SB35.2@41.549,7.123
NetSB1_2: SB1.2 SB21.2 U6.A3 U6.A13 U6.R14 | length 34.5
  Top Layer w0.1: v1(62.425,54.65) 62.784,54.65 64.05,55.916 U6.A13@64.05,56.625
  Top Layer w0.25: SB1.2@61.35,68.625 61.35,68.45 61.975,67.825 v1(61.975,67.575) 61.975,66.795 62.126,66.644 62.856,66.644 63.4,66.1 U6.R14@63.4,65.725
  Top Layer w0.35: SB21.2@70.525,52.25 70.3,52.475 70.3,54.625 v1(70.75,55.075) 70.95,55.275 70.95,55.95 70.55,56.35 U6.A3@70.55,56.625
  Signal Layer 3 w0.25: v1(62.425,54.65) 63.425,55.65 68.525,55.65 69.1,55.075 v1(70.75,55.075)
  Bottom Layer w0.15: v1(61.975,67.575) 61.937,67.537 61.937,60.843 62.325,60.455 62.325,58.225 63,57.55 63,55.225 v1(62.425,54.65)
NetSB2_2: SB2.2 SB3.2 SB16.2 SB18.2 SB19.2 SB20.2 U6.A4 U6.A14 U6.R13 | length 61.9
  Top Layer w0.35: SB18.2@58.5,54.025 SB16.2@58.5,55.475 58.625,55.35 60.41,55.35 60.635,55.125 v1(61.575,55.125) 61.775,55.125 62,55.35 62.707,55.35 63.4,56.043 U6.A14@63.4,56.625 ; U6.R13@64.05,65.725 64.05,66.435 63.675,66.81 v1(63.675,67.025) 63.1,67.6 63.1,68.3 SB2.2@62.775,68.625 SB3.2@64.225,68.625 64.05,68.45 ; v1(66.45,52.425) 67.61,52.425 67.65,52.385 SB19.2@67.65,52.25 SB20.2@69.1,52.25 69.4,52.55 69.4,53.15 69.75,53.5 69.75,56.475 U6.A4@69.9,56.625
  Signal Layer 2 w0.35: v1(63.675,67.025) 63.45,67.025 62.05,68.425 62.05,70.89 61.385,71.555 60.68,71.555 60.425,71.3 60.425,63.875 58.275,61.725 53.2,61.725 52.65,61.175 52.65,60.375 53.625,59.4 57.025,59.4 59.425,57 59.425,55.625 59.925,55.125 v1(61.575,55.125) 61.75,55.3 63.275,55.3 66.15,52.425 v1(66.45,52.425)
NetSB4_2: SB4.2 SB5.2 U6.R3 | length 4.7
  Top Layer w0.1: SB4.2@71.275,68.625 SB5.2@72.725,68.625
  Top Layer w0.127: U6.R3@70.55,65.725 70.55,67.8 71.275,68.525 SB4.2@71.275,68.625
NetSB22_2: SB22.2 U6.E2 | length 8.9
  Top Layer w0.1: U6.E2@71.2,59.225 71.525,58.9 72.675,58.9 74.125,57.45 v1(74.125,56)
  Top Layer w0.127: v1(74.13,53.695) 74.13,52.27 SB22.2@74.15,52.25
  Bottom Layer w0.127: v1(74.13,53.695) v1@74.13,56
NetSB24_2: SB24.2 U7.A4 | length 3.2
  Top Layer w0.127: SB24.2@33.05,51.25 U7.A4@33.05,54.425
NetSB26_2: SB26.2 U10.A4 | length 3.5
  Top Layer w0.127: U10.A4@64.775,33.55 68.225,33.55 SB26.2@68.25,33.525
NetSB27_1: SB27.1 U10.A5 | length 2.2
  Top Layer w0.127: U10.A5@64.775,32.55 64.775,30.4 SB27.1@64.825,30.35
NetSB28_2: SB28.2 U12.A9 | length 4.3
  Top Layer w0.1: SB28.2@34.1,27.875 34.1,28.775 34.425,29.1 34.8,29.1 36.225,30.525 U12.A9@36.225,31.125
NetSB38_2: SB38.2 U12.C6 | length 33.2
  Top Layer w0.09: U12.C6@37.725,32.125 37.975,31.875 37.975,30.775
  Top Layer w0.1: v1(37.975,30.25) 37.975,30.775
  Bottom Layer w0.1: 37.975,27.5 v1(37.975,30.25)
  Bottom Layer w0.12: 37.975,27.5 37.975,12.675 41.025,9.625 43.025,9.625 43.975,8.675 43.975,6.875 42.899,5.799 SB38.2@42.899,3.123
NetSB41_1: SB41.1 SB42.1 U6.N1 | length 12.4
  Top Layer w0.1: U6.N1@71.85,64.425 71.55,64.725 71.55,65.275 71.675,65.4 72.275,65.4
  Top Layer w0.127: 72.275,65.4 73.05,66.175 73.775,66.175 74.275,66.675 74.275,67.175 73.525,67.925 73.525,71.128 74.15,71.753 SB42.1@74.15,72.675 73.938,72.463 72.675,72.463
NJTRST: R150.1 U6.B6 | length 93.7
  Top Layer w0.1: 65.75,52.625 65.75,53.383 66.292,53.925 67.505,53.925 68.275,54.695 68.275,56.95 U6.B6@68.6,57.275
  Top Layer w0.12: v1(48.55,48.485) 62.532,48.485 65.75,51.703 65.75,52.625
  Signal Layer 3 w0.12: v1(15.55,14.775) 17.375,14.775 17.775,14.375 45.825,14.375 47.2,15.75 v1(49,15.75)
  Bottom Layer w0.12: R150.1@15,14.775 v1(15.55,14.775) ; v1(48.55,48.485) 48.55,20.3 49,19.85 v1(49,15.75)
NRST: B1.3 B1.4 C32.2 CN5.3 CN7.12 R108.1 R151.1 SB24.1 SB26.1 SB44.2 U6.L1 U9.15 U16.5 U31.1 | length 297.4
  Top Layer w0.1: U6.L1@71.85,63.125 72.125,63.125 72.625,63.625 74.125,63.625 74.475,63.975 C32.2@74.975,63.975 75.425,64.425
  Top Layer w0.12: CN7.12@7.543,22.799 6.526,22.799 5.675,23.65 5.675,26.95 5.975,27.25 10.751,27.25 U16.5@10.911,27.089 10.972,27.15 v1(11.425,27.15) ; v1(11.425,24) R108.1@13.811,24 ; R108.1@13.811,24.239 R108.1@13.811,24 ; v1(16.05,23.325) 14.025,23.325 13.811,23.539 R108.1@13.811,24 ; v1(32.125,50.15) SB24.1@33.05,50.15 ; v1(74.295,42.42) CN5.3@76.112,42.42 ; 75.425,64.425 75.46,64.46 82.54,64.46 v1(85.075,61.925) ; v1(113.625,50.05) U9.15@114.8,50.05
  Top Layer w0.127: SB26.1@69.35,33.525 69.405,33.58 v1(74.295,33.58)
  Signal Layer 3 w0.12: v1(11.425,42.725) 18.475,42.725 18.78,42.42 v1(32.125,42.42) v1(74.295,42.42) 77.928,42.42 77.933,42.425 v1(85.625,42.425) ; v1(85.075,61.925) 85.104,61.896 96.95,61.896 97.346,61.5 113.475,61.5 v1(113.925,61.95) 147.475,61.95 v1(147.5,61.925)
  Bottom Layer w0.12: v1(11.425,24) v1(11.425,27.15) v1(11.425,42.725) ; R151.1@15.025,13.725 16.525,13.725 16.775,13.975 16.775,17.725 16.05,18.45 16.05,22.477 16.055,22.482 16.055,22.818 16.05,22.823 v1(16.05,23.325) ; v1(32.125,42.42) v1(32.125,50.15) ; v1(74.295,33.58) v1(74.295,42.42) ; v1(85.625,42.425) 85.625,56.976 85.427,57.175 85.427,60.954 85.43,60.957 85.43,61.57 v1(85.075,61.925) 85.075,62.975 85.225,63.125 85.225,84.725 85.375,84.875 85.375,85.725 85.65,86 SB44.2@86.4,86 ; v1(113.625,50.05) 113.278,50.397 113.278,61.303 v1(113.925,61.95) ; v1(147.5,61.925) U31.1@147.5,65.75 B1.3@149.925,65.75 B1.4@149.925,75.25
OCSPI1_CLK: R83.1 U10.B2 | length 3.6
  Top Layer w0.127: U10.B2@63.775,35.55 65.3,37.075 R83.1@65.3,38.475
OCSPI1_DQS: R101.1 U10.C3 | length 4.1
  Top Layer w0.127: U10.C3@62.775,34.55 63.275,34.05 63.275,30.75 R101.1@63.375,30.65
OCSPI1_IO0: R95.2 U10.D3 | length 4.6
  Top Layer w0.127: R95.2@57.9,33.775 58.875,33.775 60.125,35.025 61.3,35.025 U10.D3@61.775,34.55
OCSPI1_IO1: R91.2 U10.D2 | length 4.1
  Top Layer w0.127: R91.2@57.9,35.975 57.975,36.05 61.275,36.05 U10.D2@61.775,35.55
OCSPI1_IO2: R100.1 U10.C4 | length 3.1
  Top Layer w0.127: R100.1@62.3,30.65 62.25,30.7 62.25,33.025 U10.C4@62.775,33.55
OCSPI1_IO3: R98.2 U10.D4 | length 3.6
  Top Layer w0.127: R98.2@60.15,30.65 60.15,31.1 61.25,32.2 61.25,33.025 U10.D4@61.775,33.55
OCSPI1_IO4: R99.2 U10.D5 | length 2.1
  Top Layer w0.127: R99.2@61.225,30.65 61.225,31.45 61.775,32 U10.D5@61.775,32.55
OCSPI1_IO5: R96.2 U10.E3 | length 3.7
  Top Layer w0.127: R96.2@57.9,32.65 58.354,32.65 60.254,34.55 U10.E3@60.775,34.55
OCSPI1_IO6: R93.2 U10.E2 | length 3.1
  Top Layer w0.127: R93.2@57.9,34.9 59,34.9 59.65,35.55 U10.E2@60.775,35.55
OCSPI1_IO7: R87.2 U10.E1 | length 3.1
  Top Layer w0.127: R87.2@57.9,37.05 60.275,37.05 U10.E1@60.775,36.55
OCSPI1_NCS: R81.1 R82.2 U10.C2 | length 4.3
  Top Layer w0.127: U10.C2@62.775,35.55 63.3,36.075 63.3,38.325 R81.1@63.15,38.475 R82.2@64.225,38.475
OCSPI2_CLK: R60.1 U7.B2 | length 3.1
  Top Layer w0.127: U7.B2@35.05,55.425 35.825,54.65 R60.1@37.85,54.65
OCSPI2_DQS: R53.1 U7.C3 | length 4
  Top Layer w0.127: U7.C3@34.05,56.425 34.55,55.925 37.825,55.925 R53.1@37.85,55.9
OCSPI2_IO0: R37.1 U7.D3 | length 4.2
  Top Layer w0.127: R37.1@32.975,61.225 32.975,60.1 33.55,59.525 33.55,57.925 U7.D3@34.05,57.425
OCSPI2_IO1: R46.1 U7.D2 | length 3
  Top Layer w0.127: U7.D2@35.05,57.425 35.55,57.925 37.75,57.925 R46.1@37.85,58.025
OCSPI2_IO2: R52.1 U7.C4 | length 3.1
  Top Layer w0.127: R52.1@30.15,56.025 30.25,55.925 32.55,55.925 U7.C4@33.05,56.425
OCSPI2_IO3: R45.1 U7.D4 | length 3.4
  Top Layer w0.127: R45.1@30.15,58.6 30.9,58.6 31.575,57.925 32.55,57.925 U7.D4@33.05,57.425
OCSPI2_IO4: R48.2 U7.D5 | length 1.9
  Top Layer w0.127: R48.2@30.15,57.35 30.225,57.425 U7.D5@32.05,57.425
OCSPI2_IO5: R38.2 U7.E3 | length 2.8
  Top Layer w0.127: U7.E3@34.05,58.425 R38.2@34.05,61.225
OCSPI2_IO6: R39.2 U7.E2 | length 2.8
  Top Layer w0.127: U7.E2@35.05,58.425 35.05,61.15 R39.2@35.125,61.225
OCSPI2_IO7: R40.2 U7.E1 | length 2.9
  Top Layer w0.127: U7.E1@36.05,58.425 36.05,61.075 R40.2@36.2,61.225
OCSPI2_NCS: R65.1 R66.2 U7.A3 | length 4.1
  Top Layer w0.127: U7.A3@34.05,54.425 34.05,53.025 34.525,52.55 R65.1@34.525,51.65 35.695,51.65 R66.2@35.7,51.645
OSC_25M: R35.1 R68.1 | length 59.5
  Top Layer w0.127: R35.1@76.975,63.75 77.575,63.75 v1(77.875,63.45) ; R68.1@122,50.55 v1(122.725,50.55)
  Signal Layer 3 w0.102: v1(77.875,63.45) v1(122.725,63.45)
  Bottom Layer w0.127: v1(122.725,50.55) v1(122.725,63.45)
PC14: R62.1 U6.D2 | length 8
  Top Layer w0.1: U6.D2@71.2,58.575 71.425,58.575 71.725,58.275 72.425,58.275 73.375,57.325 73.375,55.225 75.075,53.525 75.425,53.525
  Top Layer w0.127: 75.425,53.525 R62.1@75.925,53.525
PC15: R54.1 U6.D1 | length 6.8
  Top Layer w0.1: U6.D1@71.85,58.575 72.55,58.575 73.65,57.475 73.65,55.45 74.125,54.975 75.425,54.975
  Top Layer w0.127: 75.425,54.975 R54.1@75.925,54.975
PF6: CN4.3 SB10.1 SB17.1 SB29.2 U6.H1 U12.E4 | length 218.2
  Top Layer w0.09: 38.475,34.906 38.475,33.375 U12.E4@38.725,33.125
  Top Layer w0.1: 38.475,34.906 38.475,35.225 v1(39.075,35.825) ; U6.H1@71.85,61.175 73.725,61.175 74.025,61.475 74.925,61.475 v1(75.575,62.125)
  Top Layer w0.12: v1(15.325,65.15) 13.825,66.65 13.825,69.4 v1(15.325,70.9) ; SB29.2@51.875,24.45 51.875,25.675 v1(52.839,26.639) ; v1(125.984,38.864) CN4.3@127.801,38.864
  Signal Layer 3 w0.1: 33.2,35.825 v1(39.075,35.825)
  Signal Layer 3 w0.12: v1(12.625,35.825) 33.2,35.825 ; v1(15.325,65.15) v1(16.5,65.15) ; v1(40.65,26.3) 45.75,26.3 46.089,26.639 v1(52.839,26.639) v1(83.5,26.639) ; v1(75.575,62.125) 75.58,62.13 83.12,62.13 v1(83.5,61.75) ; v1(83.5,38.864) v1(125.984,38.864)
  Bottom Layer w0.1: v1(39.075,35.825) 39.075,34.775 40.65,33.2 40.65,27.5
  Bottom Layer w0.12: v1(12.625,35.825) 12.625,39.95 15.625,42.95 15.625,48.225 16.5,49.1 v1(16.5,65.15) ; SB10.1@14.2,65.15 v1(15.325,65.15) ; SB17.1@14.2,70.9 v1(15.325,70.9) ; v1(40.65,26.3) 40.65,27.5 ; v1(83.5,26.639) v1(83.5,38.864) v1(83.5,61.75)
PF7: CN4.6 SB7.1 SB14.1 SB25.2 SB30.2 U6.J3 U12.D3 | length 226.7
  Top Layer w0.12: v1(15.325,62.275) 15.984,62.934 15.984,67.366 v1(15.325,68.025) ; SB30.2@55.675,24.45 v1(55.675,27.125) ; CN4.6@124.372,46.484 v1(126.188,46.484) 133.581,46.484 SB25.2@133.586,46.489
  Top Layer w0.127: U6.J3@70.55,61.825 v2(70.875,61.5)
  Signal Layer 1 w0.1: v2(39.225,32.625) v1(42.45,32.625) ; v2(70.875,61.5) 74.825,61.5 75.425,60.9 ; v1(74.45,59.375) 75.25,59.375 75.425,59.55
  Signal Layer 1 w0.12: 75.425,59.55 75.5,59.625 75.5,60.825 75.425,60.9
  Signal Layer 3 w0.1: 33.2,32.625 v1(42.45,32.625)
  Signal Layer 3 w0.12: v1(12,34.225) 23.85,34.225 25.45,32.625 33.2,32.625 ; v1(42.4,26.75) 45.2,26.75 45.575,27.125 v1(55.675,27.125) v1(82.925,27.125) ; v1(74.45,59.375) v1(82.925,59.375) ; v1(82.925,46.484) 88.641,46.484 92.725,42.4 122.104,42.4 v1(126.188,46.484)
  Bottom Layer w0.12: v1(12,34.225) 12,40.225 15.125,43.35 15.125,48.35 15.625,48.85 15.625,60.408 15.896,60.68 15.896,61.704 v1(15.325,62.275) SB7.1@14.2,62.275 ; SB14.1@14.2,68.025 v1(15.325,68.025) ; v1(42.4,26.75) 42.4,28.6 41.975,29.025 41.975,32.15 v1(42.45,32.625) ; v1(82.925,27.125) v1(82.925,46.484) v1(82.925,59.375)
PMOD1: P1.1 P2.1 SB15.2 SB17.2 | length 24.4
  Signal Layer 3 w0.12: P2.1@9.975,72 12.5,72 13.975,73.475 26.445,73.475 P1.1@28.05,75.08
  Bottom Layer w0.12: P2.1@9.95,72 P2.1@9.975,72 11.15,72 12.25,70.9 13.075,70.9 SB15.2@13.075,69.45
PMOD2: P1.2 P2.2 SB12.2 SB14.2 | length 25.2
  Signal Layer 3 w0.12: P2.2@9.975,70 12.375,70 14.375,72 v1(25.2,72)
  Bottom Layer w0.12: P2.2@9.95,70 P2.2@9.975,70 11.25,70 11.975,69.275 11.975,68.275 12.225,68.025 13.075,68.025 SB12.2@13.075,66.575 ; v1(25.2,72) 25.2,72.9 25.51,73.21 P1.2@25.51,75.08
PMOD3: P1.3 P2.3 SB8.2 SB10.2 | length 25.4
  Signal Layer 3 w0.12: P2.3@9.975,68 13.7,68 14.425,68.725 18.425,68.725 20.2,70.5 v1(22.97,70.5)
  Bottom Layer w0.12: P2.3@9.95,68 P2.3@9.975,68 11.25,68 11.85,67.4 11.85,65.55 12.25,65.15 13.075,65.15 SB8.2@13.075,63.7 ; v1(22.97,70.5) P1.3@22.97,75.08
PMOD4: P1.4 P2.4 SB6.2 SB7.2 | length 25.9
  Signal Layer 3 w0.12: P2.4@9.975,66 17.525,66 18.175,66.65 19.45,66.65 v1(20.625,67.825)
  Bottom Layer w0.12: P2.4@9.95,66 11.6,64.35 11.6,62.5 11.825,62.275 13.075,62.275 SB6.2@13.075,60.825 ; P1.4@20.43,75.08 20.43,72.595 20.625,72.4 v1(20.625,67.825)
PMOD11: P1.7 P2.11 U6.N15 | length 69.9
  Top Layer w0.1: 59.206,68.123 60.55,66.778 60.55,66.233 62.358,64.425 U6.N15@62.75,64.425
  Top Layer w0.12: v1(58.502,75.075) 58.502,68.826 59.206,68.123
  Signal Layer 3 w0.12: P2.11@7.975,72 7.975,75.125 12.3,79.45 26.22,79.45 P1.7@28.05,77.62 35.355,77.62 37.9,75.075 v1(58.502,75.075)
PMOD12: P1.8 P2.12 U6.K1 | length 91.4
  Top Layer w0.1: U6.K1@71.85,62.475 72.45,62.475 72.95,62.975 73.6,62.975 v1(74,62.575)
  Signal Layer 3 w0.1: P2.12@7.975,70 8.975,69 11.025,69 ; 59.175,62.725 59.4,62.95 60.55,62.95 60.8,62.7 65.57,62.7 65.662,62.792 68.567,62.792 69.025,63.25 73.325,63.25 v1(74,62.575)
  Signal Layer 3 w0.12: 11.025,69 12.85,69 13.975,70.125 16.925,70.125 17.8,71 v1(20.1,71) v1(23.775,71) ; v1(20.1,61.75) 20.465,62.115 30.806,62.115 31.081,61.84 51.619,61.84 51.754,61.975 58.425,61.975 59.175,62.725
  Bottom Layer w0.12: v1(20.1,61.75) v1(20.1,71) ; v1(23.775,71) 23.775,73 24.25,73.475 24.25,76.36 P1.8@25.51,77.62
PMOD17: CN20.6 P2.17 U6.P9 | length 96.9
  Top Layer w0.1: 66.325,69.075 66.325,65.4 U6.P9@66.65,65.075
  Top Layer w0.12: 66.325,69.075 66.325,72.4 v1(66.775,72.85)
  Signal Layer 3 w0.1: P2.17@7.975,60 8.975,59 11.025,59
  Signal Layer 3 w0.12: 11.025,59 11.164,59 12.364,60.2 v1(24.375,60.2) ; v1(24.375,72.475) 61.55,72.475 62.13,73.055 63.545,73.055 63.75,72.85 v1(66.775,72.85)
  Bottom Layer w0.12: CN20.6@6.425,45.212 5.15,46.487 5.15,57.175 P2.17@7.975,60 ; v1(24.375,60.2) v1(24.375,72.475)
PMOD18: CN20.3 CN20.4 P2.18 U6.R11 | length 97
  Top Layer w0.1: U6.R11@65.35,65.725 v1(65.35,67.475)
  Signal Layer 3 w0.1: P2.18@7.975,58 8.975,57 11.025,57
  Signal Layer 3 w0.12: 11.025,57 11.375,57 13.375,59 v1(24.875,59) ; v1(25.325,71) v1(32.95,71) ; v1(32.95,74.575) 62.043,74.575 62.468,75 v1(64.675,75)
  Bottom Layer w0.1: 64.675,69.075 64.675,68.15 v1(65.35,67.475)
  Bottom Layer w0.12: CN20.3@7.695,46.482 CN20.4@6.425,46.482 5.675,47.232 5.675,55.7 P2.18@7.975,58 ; v1(24.875,59) 24.875,68.9 25.325,69.35 v1(25.325,71) ; v1(32.95,71) v1(32.95,74.575) ; 64.675,69.075 v1(64.675,75)
PMOD19: CN20.5 P2.19 U6.R9 | length 94.2
  Top Layer w0.1: U6.R9@66.65,65.725 66.65,66.475 66.539,66.587 66.539,68.963 66.65,69.075
  Top Layer w0.127: 66.65,69.075 66.698,69.123 66.698,70.152 66.775,70.229 v1(66.775,72.2)
  Signal Layer 3 w0.1: P2.19@7.975,56 8.975,55 11.025,55
  Signal Layer 3 w0.12: 11.025,55 11.2,55 12.75,56.55 v1(25.725,56.55) ; v1(25.93,72.03) 30.68,72.03 30.85,72.2 v1(66.775,72.2)
  Bottom Layer w0.12: CN20.5@7.695,45.212 8.725,46.242 8.725,51.25 6.725,53.25 6.725,54.75 P2.19@7.805,55.83 ; v1(25.725,56.55) 25.725,63.827 25.93,64.032 v1(25.93,72.03)
PMOD20: CN20.7 P2.20 U6.N11 | length 92.8
  Top Layer w0.127: v2(65.025,64.75) U6.N11@65.35,64.425
  Signal Layer 1 w0.1: v2(65.025,64.75) 65.8,65.525 65.8,67.875 65.103,68.572 65.103,69.953 v1(65.575,70.425)
  Signal Layer 3 w0.12: P2.20@7.975,54 9.175,52.8 12.2,52.8 13.625,54.225 v1(26.3,54.225) ; v1(27.25,69.775) 27.7,70.225 34.125,70.225 34.38,69.97 53.595,69.97 54.05,70.425 61.127,70.425 61.132,70.42 65.57,70.42 v1(65.575,70.425)
  Bottom Layer w0.12: CN20.7@7.695,43.942 8.742,43.942 9.075,44.275 9.075,52.9 P2.20@7.975,54 ; v1(26.3,54.225) 26.3,66.575 27.25,67.525 v1(27.25,69.775)
POE1: C1.1 C2.1 C7.1 C18.1 C28.1 C30.1 C39.1 C42.1 C52.1 D7.2 R43.1 R44.1 R61.1 T1.4 T2.1 U2.3 U8.9 | length 30.5
  Top Layer w0.4: U8.9@104.851,53.996 106.116,53.996 R61.1@106.157,54.037 ; C52.1@106.157,49.846 v1(106.157,50.643)
  Top Layer w0.5: v1(97.725,67.339) 97.725,66.394 C30.1@97.8,66.319 ; C30.1@98.159,65.91 98.6,66.351 v1(98.6,67.339)
  Top Layer w0.6: T2.1@94.48,83.005 96.62,83.005 97.37,82.255 T1.4@97.603,82.255 v1(98.97,82.255) ; C30.1@97.8,66.319 97.775,66.294 C30.1@98.159,65.91 99.46,65.91 99.886,66.336 C28.1@99.886,67.839 99.471,68.254 U2.3@98.136,68.254 ; R44.1@98.011,58.689 v1(98.011,57.539) C39.1@100.461,57.539 ; C7.1@98.736,85.289 v1(98.736,86.286) ; C1.1@101.461,85.789 v1(101.461,86.936) ; v1(102.1,75.375) 102.601,75.375 C18.1@103.061,74.914 ; C2.1@104.586,85.789 v1(104.586,86.936) ; C42.1@105.961,57.539 v1(106.914,57.539) ; v1(106.975,55.075) 106.157,54.257 R61.1@106.157,54.037 106.419,53.775 108.076,53.775 D7.2@108.836,53.014 ; v1(109.811,58.011) R43.1@109.811,59.514
POE2: R4.2 T1.3 T2.2 | length 6.5
  Top Layer w0.6: T2.2@94.48,80.505 94.73,80.255 T1.3@97.603,80.255 98.73,80.255 99.475,81 100.297,81 R4.2@100.511,81.214
POE3: R5.2 T1.2 T2.3 T4.2 T4.4 | length 27.5
  Top Layer w0.6: T2.3@94.48,78.005 94.601,78.125 T1.2@97.245,78.125 ; T1.2@97.603,78.255 98.03,78.255 98.889,79.114 R5.2@100.086,79.114 100.086,78.664 v1(99.297,77.875)
  Top Layer w1: 102.75,67.8 103.1,67.8 104.841,67.8 T4.4@105.169,68.128 T4.2@105.169,61.778
  Bottom Layer w1: v1(99.297,77.875) 99.297,71.003 v1(102.5,67.8)
POE4: C14.2 C18.2 L1.1 T1.1 T2.4
POE5: D2.1 R7.1 T1.7 T1.8 T2.5 T2.6 | length 6.4
  Top Layer w0.12: D2.1@78.706,76.214 D2.1@78.711,76.219 ; T2.5@83.05,75.505 83.4,75.855 85.623,75.855 T1.8@86.023,76.255 ; T2.6@83.05,78.005 83.3,78.255 T1.7@86.023,78.255